# EAGLE board v1 (EAGLE 9.2.2)
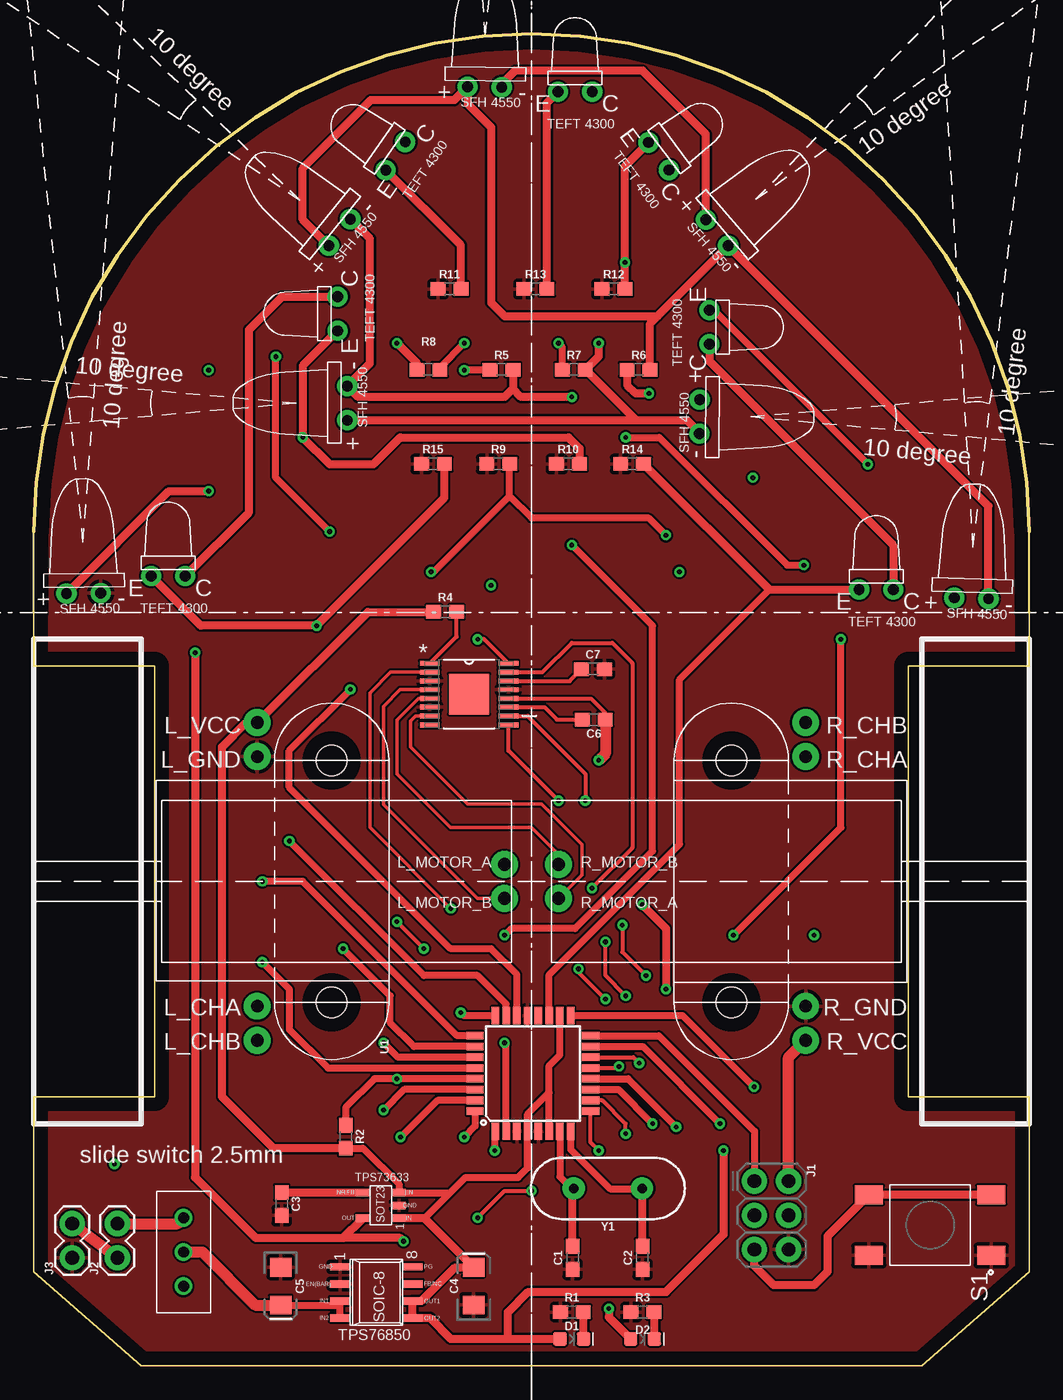
[diagram p0: board, top side]
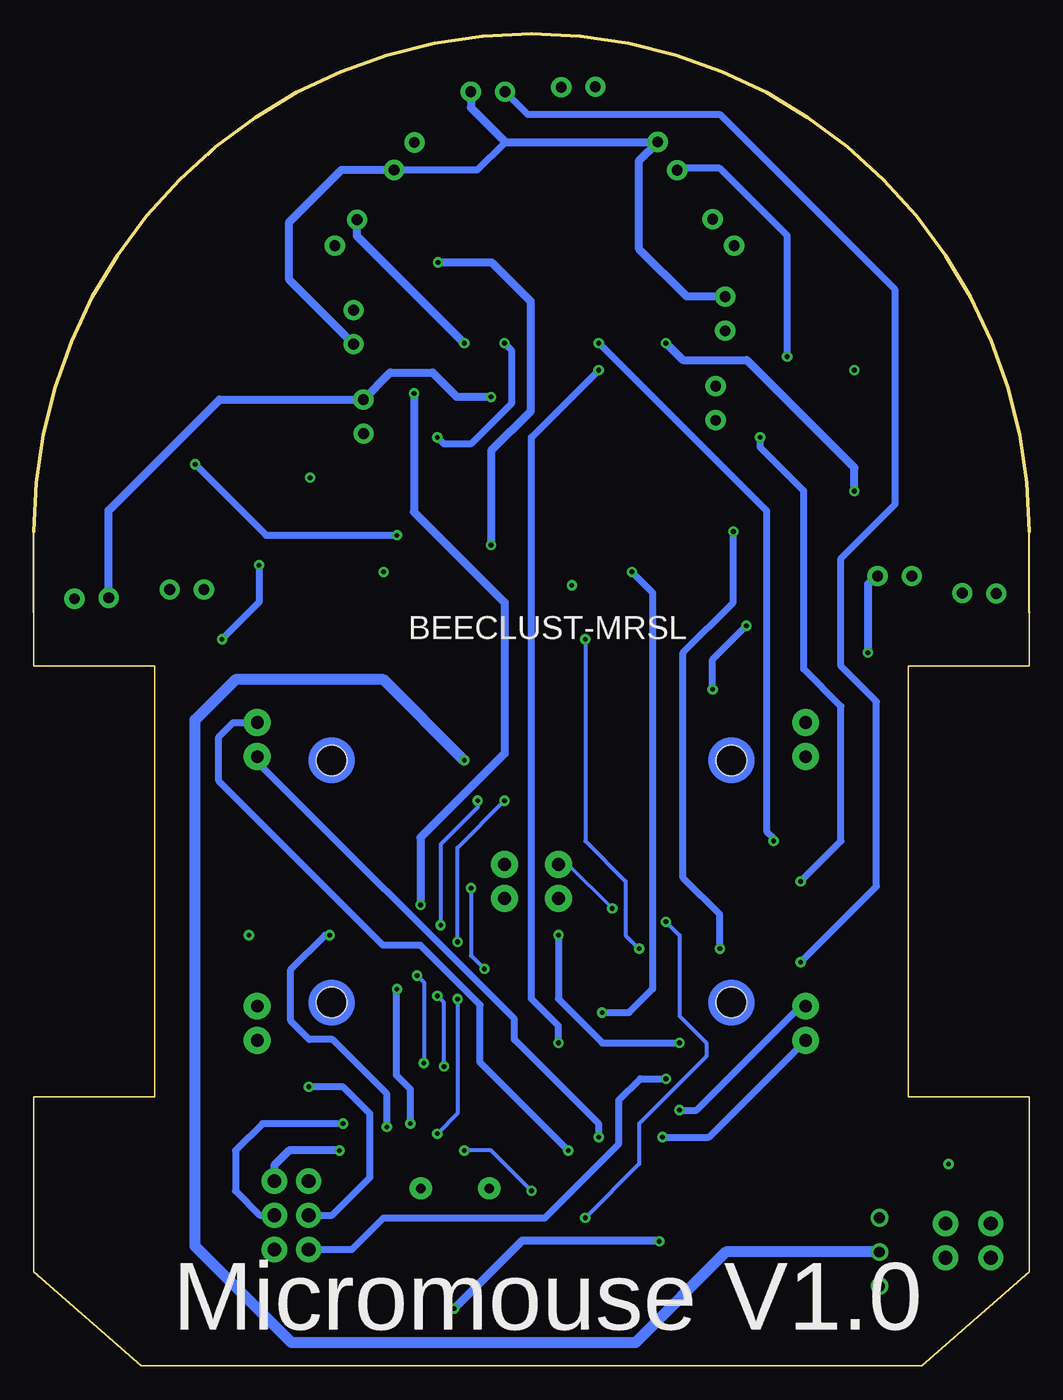
[diagram p1: board, bottom side, seen from below]

Size 74 x 99 mm. Coordinates in mm from the lower left corner, seen from the top.
Outline: 0,16 0,7 8,0 66,0 74,7 74,16
Outline: 0,56 0,62 arc-180 74,62 74,56
Copper layers (1*16): Top 0.035mm / dielectric 1.5mm / Bottom 0.035mm
Design rules "default": minimum track width 6mil, minimum drill 0.35mm, track to track 6mil, track to pad 6mil, pad to pad 6mil, via to via 6mil, smd to smd 6mil, copper to edge 40mil, drill to drill 6mil, minimum pad ring 10mil, minimum via ring 8mil, stop-mask expansion 4mil, vias tented up to drill 0mil, thermal gap 10mil

## Footprints (pad centres in the part's own frame; a part is rotated, then mirrored left to right if it is on the bottom)
0603 = smd 1.1 x 1: 1 -0.85,0; 2 0.85,0
EIA3216 = smd 1.4 x 1.6: + 1.4,0; - -1.4,0
LED-0603 = smd 1 x 1: A -0.877,0; C 0.877,0
SOP65P640X120-17N = smd 1.473 x 0.356: 1 -2.921,2.286; 2 -2.921,1.626; 3 -2.921,0.965; 4 -2.921,0.33; 5 -2.921,-0.33; 6 -2.921,-0.965; 7 -2.921,-1.626; 8 -2.921,-2.286; 9 2.921,-2.286; 10 2.921,-1.626; 11 2.921,-0.965; 12 2.921,-0.33; 13 2.921,0.33; 14 2.921,0.965; 15 2.921,1.626; 16 2.921,2.286 | smd 2.997 x 2.997: 17 0,0
2X3-NS = drill 1.016 pad 1.88: 1 -2.54,-1.27; 2 -2.54,1.27; 3 0,-1.27; 4 0,1.27; 5 2.54,-1.27; 6 2.54,1.27
1X02 = drill 1.016 pad 1.88: 1 0,0; 2 2.54,0
SW_2-1437565-7 = smd 2.1 x 1.4: 1 -4.55,2.25; 2 4.55,2.25; 3 -4.55,-2.25; 4 4.55,-2.25
TQFP32-08 = smd 1.27 x 0.559: 1 -4.293,2.8; 2 -4.293,2; 3 -4.293,1.2; 4 -4.293,0.4; 5 -4.293,-0.4; 6 -4.293,-1.2; 7 -4.293,-2; 8 -4.293,-2.8; 17 4.293,-2.8; 18 4.293,-2; 19 4.293,-1.2; 20 4.293,-0.4; 21 4.293,0.4; 22 4.293,1.2; 23 4.293,2; 24 4.293,2.8 | smd 0.559 x 1.27: 9 -2.8,-4.293; 10 -2,-4.293; 11 -1.2,-4.293; 12 -0.4,-4.293; 13 0.4,-4.293; 14 1.2,-4.293; 15 2,-4.293; 16 2.8,-4.293; 25 2.8,4.293; 26 2,4.293; 27 1.2,4.293; 28 0.4,4.293; 29 -0.4,4.293; 30 -1.2,4.293; 31 -2,4.293; 32 -2.8,4.293
TPS73633(SOT-23) = smd 0.55 x 1: EN 0.95,-1.35; GND 0,-1.35; IN -0.95,-1.35; NR/FB 0.95,1.35; OUT -0.95,1.35
TPS76850(SOIC-8) = smd 0.55 x 1.5: EN(BAR) -0.635,-2.7; FB/NC -0.635,2.7; GND -1.905,-2.7; IN1 0.635,-2.7; IN2 1.905,-2.7; OUT1 0.635,2.7; OUT2 1.905,2.7; PG -1.905,2.7
TS02_SWITCH = drill 0.8: PIN1 0,2.54; PIN2 0,0; PIN3 0,-2.54
FUTURA_V1.0_MOTOT_MOUNT = drill 0.95 pad 2: L_CHA -20.375,26.73; L_CHB -20.375,24.19; L_GND -20.375,45.27; L_MOTOR_A -2,37.27; L_MOTOR_B -2,34.73; L_VCC -20.375,47.81; R_CHA 20.375,45.27; R_CHB 20.375,47.81; R_GND 20.375,26.73; R_MOTOR_A 2,34.73; R_MOTOR_B 2,37.27; R_VCC 20.375,24.19 | hole 2.286: 14.85,45; 14.85,27; -14.85,27; -14.85,45
EMITTER = drill 0.8 pad 1.5: + -1.27,-0.5; - 1.27,-0.5
RECEIVER = drill 0.8 pad 1.5: C 1.27,-0.5; E -1.27,-0.5
HC49US = drill 0.7 pad 1.651: 1 -2.54,0; 2 2.54,0

## Placement (x,y rotation side)
C1  22pF  [0603]  40.06,8.03 90 top
C2  22pF  [0603]  45.25,8.03 90 top
C3  0.1uF  [0603]  18.44,12.03 270 top
C4  10uF  [EIA3216]  32.71,5.92 90 top
C5  10uF  [EIA3216]  18.36,5.92 270 top
C6  10pF  [0603]  41.63,48.03 180 top
C7  2.2uF  [0603]  41.57,51.78 0 top
D1  [LED-0603]  40,2 0 top
D2  [LED-0603]  45.25,2 0 top
DRV8833PWP1  [SOP65P640X120-17N]  32.36,49.92 0 top
J1  AVR_SPI_PROG_3X2NS  [2X3-NS]  54.84,11.19 270 top
J2  [1X02]  6.22,8.03 90 top
J3  [1X02]  2.87,8.03 90 top
R1  330  [0603]  40,4 0 top
R2  10k  [0603]  23.2,17.03 270 top
R3  150  [0603]  45.25,4 0 top
R4  10k  [0603]  30.58,56.03 0 top
R5  470  [0603]  34.77,74.03 0 top
R6  470  [0603]  44.96,74.03 0 top
R7  470  [0603]  40.15,74.03 0 top
R8  1k  [0603]  29.34,74.03 0 top
R9  4.7k  [0603]  34.53,67.03 0 top
R10  4.7k  [0603]  39.72,67.03 0 top
R11  4.7k  [0603]  30.91,80.03 0 top
R12  4.7k  [0603]  43.1,80.03 0 top
R13  4.7k  [0603]  37.29,80.03 0 top
R14  4.7k  [0603]  44.48,67.03 0 top
R15  4.7k  [0603]  29.67,67.03 0 top
S1  2-1437565-7  [SW_2-1437565-7]  66.63,10.46 180 top
U1  ATMEGA328P_TQFP  [TQFP32-08]  37.11,21.73 90 top
U$1  TPS73633(SOT-23)  [TPS73633(SOT-23)]  25.79,11.92 90 top
U$2  TPS76850(SOIC-8)  [TPS76850(SOIC-8)]  25.47,5.46 270 top
U$3  TS02_SWITCH  [TS02_SWITCH]  11.14,8.46 0 top
U$4  FUTURA_V1.0_MOTOR_MOUNT  [FUTURA_V1.0_MOTOT_MOUNT]  37,0 0 top
U$5  EMITTER  [EMITTER]  69.71,57.54 358.3 top
U$6  EMITTER  [EMITTER]  33.53,95.54 359.4 top
U$7  EMITTER  [EMITTER]  22.35,84.54 51 top
U$8  EMITTER  [EMITTER]  51.17,84.54 310.6 top
U$9  EMITTER  [EMITTER]  49.99,70.54 269.8 top
U$10  EMITTER  [EMITTER]  22.81,71.54 90 top
U$11  EMITTER  [EMITTER]  3.71,57.92 0.8 top
U$12  RECEIVER  [RECEIVER]  50.72,77.19 270 top
U$13  RECEIVER  [RECEIVER]  22.1,78.19 90 top
U$14  RECEIVER  [RECEIVER]  26.48,90.19 55.2 top
U$15  RECEIVER  [RECEIVER]  46.86,90.19 306.6 top
U$16  RECEIVER  [RECEIVER]  40.24,95.19 0 top
U$17  RECEIVER  [RECEIVER]  62.62,58.19 0 top
U$18  RECEIVER  [RECEIVER]  10,59.19 0 top
Y1  16MHz  [HC49US]  42.68,13.19 180 top

## Library data of the parts
C1 C2 = SparkFun-Capacitors; PROD_ID: CAP-07876
C3 = SparkFun-Capacitors; PROD_ID: CAP-00810
C4 C5 = SparkFun-Capacitors; PROD_ID: CAP-00811
C6 = SparkFun-Capacitors; PROD_ID: CAP-11812
C7 = SparkFun-Capacitors; PROD_ID: CAP-07888
D1 D2 = SparkFun-LED
DRV8833PWP1 = DRV8833PWP
J1-J3 = SparkFun-Connectors
R1 = SparkFun-Resistors; PROD_ID: RES-00818
R2 R4 = SparkFun-Resistors; PROD_ID: RES-00824
R3 = SparkFun-Resistors; PROD_ID: RES-11028
R5-R7 = SparkFun-Resistors; PROD_ID: RES-07869
R8 = SparkFun-Resistors; PROD_ID: RES-07856
R9-R15 = SparkFun-Resistors; PROD_ID: RES-07857
S1 = 2-1437565-7; MANUFACTURER: TE Connectivity; PARTREV: V; STANDARD: Manufacturer recommendations
U1 = SparkFun-IC-Microcontroller; PROD_ID: IC-09069
U$1 = TPS73633(SOT-23)
U$2 = TPS76850(SOIC-8)
U$3 = 2.54mm slide switch
U$4 = Futura 1.0 motor mount template
U$5-U$18 = sfh4550 & teft4300
Y1 = SparkFun-Clocks; PROD_ID: XTAL-08181; SF_ID: COM-00536

## Nets
3.3V: D2.A U$1.OUT U$12.C U$13.C U$14.C U$15.C U$16.C U$17.C U$18.C
5V: C4.+ D1.A J1.2 R2.2 R4.1 U1.4 U1.6 U1.18 U$1.EN U$1.IN U$2.OUT1 U$2.OUT2 U$4.L_VCC U$4.R_VCC
A1: DRV8833PWP1.16 U1.9
A2: DRV8833PWP1.15 U1.10
B1: DRV8833PWP1.9 U1.13
B2: DRV8833PWP1.10 U1.14
GND: C1.1 C2.1 C3.2 C4.- C5.- C7.2 DRV8833PWP1.3 DRV8833PWP1.6 DRV8833PWP1.13 J1.6 J3.1 R1.1 R3.1 R9.1 R10.1 R11.1 R12.1 R13.1 R14.1 R15.1 S1.1 S1.2 U1.3 U1.5 U1.21 U$1.GND U$2.EN(BAR) U$2.GND U$4.L_GND U$4.R_GND U$11.-
IR_A: R5.1 U1.2
IR_B: R6.1 U1.11
IR_C: R7.1 U1.12
IR_D: R8.2 U1.23
L_CHA: U1.30 U$4.L_CHA
L_CHB: U1.31 U$4.L_CHB
LM_1: DRV8833PWP1.2 U$4.L_MOTOR_A
LM_2: DRV8833PWP1.4 U$4.L_MOTOR_B
MISO: J1.1 U1.16
MOSI: J1.4 U1.15
N$1: D1.C R1.2
N$2: C1.2 U1.7 Y1.2
N$3: C2.2 U1.8 Y1.1
N$4: D2.C R3.2
N$5: J2.1 J3.2
N$6: DRV8833PWP1.1 R4.2
N$7: C3.1 U$1.NR/FB
N$8: R6.2 U$5.- U$6.+ U$7.+ U$8.-
N$9: R8.1 U$11.+
N$10: R5.2 U$5.+ U$7.- U$9.+ U$10.-
N$11: R7.2 U$6.- U$8.+ U$9.- U$10.+
N$16: C7.1 DRV8833PWP1.14
N$19: C6.2 DRV8833PWP1.11
R1: R9.2 U1.24 U$12.E
R2: R10.2 U1.25 U$13.E
R3: R11.2 U1.26 U$14.E
R4: R12.2 U1.27 U$15.E
R5: R13.2 U1.28 U$16.E
R6: R14.2 U1.19 U$17.E
R7: R15.2 U1.22 U$18.E
R_CHA: U1.32 U$4.R_CHA
R_CHB: U1.1 U$4.R_CHB
RESET: J1.5 R2.1 S1.3 S1.4 U1.29
RM_1: DRV8833PWP1.7 U$4.R_MOTOR_A
RM_2: DRV8833PWP1.5 U$4.R_MOTOR_B
SCK: J1.3 U1.17
V_BAT: C5.+ C6.1 DRV8833PWP1.12 U$2.IN1 U$2.IN2 U$3.PIN2
VIN: J2.2 U$3.PIN1

## Tracks (layer width: path | path; a pad name or v marks a point on that pad's centre or on a via)
3.3V  (via drill 0.35)
  Top 0.61: U$18.C 16,63.42 16,77 18.46,79.46 U$13.C | U$12.C 50.22,74.65 63.89,60.98 U$17.C | v12,53 12,14 16.5,9.5 23,9.5 | 23,9.5 24.44,10.94 U$1.OUT | D2.A 42.75,3.62 v42.75,4.25 | v27.5,9.25 27.25,9.5 23,9.5
  Bottom 0.508: U$15.C 41.02,88.87 38.95,90.95
  Bottom 0.61: U$13.C 25.46,79.46 29,83 29,89.56 U$14.C 38.95,90.95 41.51,93.51 U$16.C | U$12.C 55,80.7 55,85 51.13,88.87 U$15.C | U$18.C 11.27,58.81 12,58.08 v12,53 | v42.75,4.25 37.67,9.33 27.58,9.33 v27.5,9.25
5V  (via drill 0.35)
  Top 0.508: U1.6 38.31,20.31 | 38.31,20.31 38.31,22.31 39.11,23.11 U1.18 | 38.31,20.31 36.71,18.71 U1.4 36.71,14.71 36,14 32.09,14 30.96,12.87 | R2.2 24.47,16.18 27.14,13.51 U$1.EN 30.96,12.87 | 29.06,10.97 30.96,12.87
  Top 0.61: U$1.IN 29.06,10.97 C4.+ 31.32,7.32 28.83,4.82 U$2.OUT1 U$2.OUT2 29.44,3.55 31,2 35.25,2 | R4.1 24.84,56.03 U$4.L_VCC 15.81,47.81 14,46 14,20 17.82,16.18 R2.2 | 35.25,2 D1.A | 35.25,2 35.25,4 36.75,5.5 47,5.5 51.27,9.77 v51.27,16
  Top 0.813: J1.2 56.11,22.92 U$4.R_VCC
  Bottom 0.61: v51.27,16 55,16 56.11,14.89 J1.2
A1  (via drill 0.35)
  Top 0.305: DRV8833PWP1.16 33.49,54 v33,54 | v29,31 v27,33 | v33,11 35,13 v37,13 | v42,16 41.4,16.6 U1.9
  Bottom 0.305: v33,54 33,39 30,36 30,32 v29,31 | v27,33 26,32 26,26 24,24 24,23 29,18 29,15 v33,11 | v37,13 40,16 v42,16
A2  (via drill 0.35)
  Top 0.305: U1.10 42.27,19.73 44,18 v44,17.25 | DRV8833PWP1.15 37.82,51.55 40,53.73 43,53.73 44.5,52.23 44.5,38.5 v41.5,35.5 | v40.5,29.5 40.5,29.25 v42.5,27.25
  Bottom 0.305: v40.5,29.5 41.5,30.5 v41.5,35.5 | v42.5,27.25 42.5,18.75 v44,17.25
B1  (via drill 0.35)
  Top 0.305: U1.13 43.38,22.13 v43.5,22.25 | v44,27.5 42.5,29 v42.5,31.5 | v39,42 35.28,45.72 DRV8833PWP1.9
  Bottom 0.305: v43.5,22.25 43.5,27 v44,27.5 | v42.5,31.5 42.5,38.5 v39,42
B2  (via drill 0.35)
  Top 0.305: U1.14 44.57,22.93 v45,22.5 | DRV8833PWP1.10 36.71,48.29 41,44 v41,42 | v43.75,32.75 43.75,30.75 v45.5,29
  Bottom 0.305: v41,42 41,41.5 43.75,38.75 v43.75,32.75 | v45.5,29 45,28.5 v45,22.5
GND
  pour Top: -4,-4 -4,109 83,109 83,-5 -3,-5
IR_A  (via drill 0.35)
  Top 0.508: U1.2 35.11,23.89 v35,24 | v32,74 32.03,74.03 R5.1
  Bottom 0.508: v35,24 35,25.27 37,27.27 37,69 v32,74
IR_B  (via drill 0.35)
  Top 0.508: v46,18 43.47,20.53 U1.11
  Top 0.61: R6.1 44.11,72.89 44.73,72.27 v45.73,72.27 | v45.25,34.25 47,32.5 v47,28
  Bottom 0.508: v47,28 47.04,27.96 47.04,21.59 46,20.55 v46,18
  Bottom 0.61: v45.73,72.27 45.73,63.46 39,56.73 39,45.5 45.25,39.25 v45.25,34.25
IR_C  (via drill 0.35)
  Top 0.508: U1.12 44.17,21.33 v47.75,17.75 | v52,32 60,40 v60,54 | R7.1 39.3,75.7 v39,76 | v44,69 46.5,69 56,59.5 v57.25,59.5
  Bottom 0.508: v52,32 52.35,32 54.9,29.45 54.9,25.64 53.52,24.26 51.8,24.26 47.75,20.21 v47.75,17.75 | v39,76 38.5,75.5 38.5,71.5 41.5,68.5 43.5,68.5 v44,69 | v57.25,59.5 57.25,56.75 v60,54
IR_D  (via drill 0.35)
  Top 0.508: U1.23 35.11,26.89 33,29 29,29 v19,39 | v32,76 30.19,74.19 R8.2
  Bottom 0.508: v19,39 19,39.19 19.54,39.73 19.54,63.54 v32,76
L_CHA  (via drill 0.35)
  Top 0.508: U1.30 27.53,20.53 v26,19
  Bottom 0.508: v26,19 24.73,19 17,26.73 U$4.L_CHA
L_CHB  (via drill 0.35)
  Top 0.508: U1.31 30,19.73 v27.27,17
  Bottom 0.508: v27.27,17 23.81,17 U$4.L_CHB
LM_1  (via drill 0.35)
  Top 0.254: DRV8833PWP1.2 26.55,51.55 25,50 25,40 v31,34
  Bottom 0.254: v31,34 34.27,37.27 U$4.L_MOTOR_A
LM_2
  Top 0.254: U$4.L_MOTOR_B 33,34.73 26,41.73 26,49 27.25,50.25 DRV8833PWP1.4
MISO
  Top 0.508: U1.16 46.47,24.53 53.57,17.43 J1.1
MOSI  (via drill 0.35)
  Top 0.508: U1.15 45.27,23.73 v51,18
  Bottom 0.508: J1.4 57.19,11.19 59,13 59,16 57,18 v51,18
N$1
  Top 0.61: D1.C 40.88,3.97 R1.2
N$2
  Top 0.508: U1.7 39.11,14.06 40.06,13.11
  Top 0.61: C1.2 40.06,13.11 Y1.2
N$3
  Top 0.508: U1.8 39.91,16.09 42.84,13.16 45.25,13.16
  Top 0.61: C2.2 45.25,13.16 Y1.1
N$4
  Top 0.61: D2.C 46.13,3.97 R3.2
N$5
  Top 0.813: J2.1 J3.2
N$6
  Top 0.305: DRV8833PWP1.1 31.43,54.2 R4.2
N$7
  Top 0.61: C3.1 U$1.NR/FB
N$8
  Top 0.61: R6.2 45.81,77.44 46.37,78 | 46.37,78 U$8.- 70.97,63.9 U$5.- | U$7.+ 20,85.18 20,89 25.05,94.05 31.25,94.05 U$6.+ 32.25,93.78 34,92.04 34,79 35,78 46.37,78
N$9  (via drill 0.35)
  Top 0.61: U$11.+ 10.05,65 v13,65 | v27,76 28.49,74.51 R8.1
  Bottom 0.61: v13,65 13,66.75 21,74.75 25.75,74.75 v27,76
N$10  (via drill 0.35)
  Top 0.61: R5.2 35.62,72.62 | 35.62,72.62 35,72 24.12,72 U$10.- 25,74.5 25,83.75 U$7.- | v40,72 36.24,72 35.62,72.62
  Bottom 0.61: U$5.+ 68.43,63.57 60.19,71.81 U$9.+ 47.49,73.81 44.35,73.81 42.54,72 v40,72
N$11  (via drill 0.35)
  Top 0.61: 44.76,70.27 R7.2 42,75.03 v42,76 | U$9.- 49.49,69.35 48.57,70.27 44.76,70.27 | U$8.+ 49.96,91.54 45.25,96.25 35.77,96.25 34.8,95.28 U$6.- | U$10.+ 44.76,70.27
  Bottom 0.61: v42,76 49.96,83.96 U$8.+
N$16
  Top 0.305: DRV8833PWP1.14 39.83,50.89 C7.1
N$19
  Top 0.305: DRV8833PWP1.11 37.95,48.95 38.88,48.03 C6.2
R1  (via drill 0.35)
  Top 0.508: U1.24 31.98,26.02 v31.75,26.25 | v29.54,59 29.73,59 35.38,64.65 | 35.38,64.65 R9.2 | U$12.E 50.54,78.46 v62,67 | v47,61.73 45.73,63 37.03,63 35.38,64.65
  Bottom 0.508: v29.54,59 28,57.46 28,28 29.75,26.25 v31.75,26.25 | v62,67 56.73,61.73 v47,61.73
R2  (via drill 0.35)
  Top 0.508: U1.25 31.47,24.53 20,36 v17,36
  Top 0.61: U$13.E 20,74.32 v20,69 22,67 25.25,67 27.25,69 39.75,69 40.57,68.18 R10.2
  Bottom 0.508: v17,36 14,39 14,49 16.77,51.77 16.77,65.02 20,68.25 v20,69
R3  (via drill 0.35)
  Top 0.508: U1.26 28.27,23.73 26.5,25.5 26.5,27.5 v23,31 | v22,62 18,66 v18,75
  Top 0.61: R11.2 31.76,83.27 U$14.E
  Bottom 0.508: v23,31 23,33.54 25.73,36.27 25.73,53 22,56.73 v22,62 | v18,75 18,84 23,89 26.03,89 U$14.E
R4  (via drill 0.35)
  Top 0.508: U1.27 27.07,22.93 v26,24 | v35,32 35.5,32.5 40.25,32.5 46,38.25 46,55 v40,61
  Top 0.61: R12.2 v43.95,82 43.95,89.16 U$15.E
  Bottom 0.508: v35,32 35,27.27 31.73,24 v26,24
  Bottom 0.61: v40,61 40,68 37.05,70.95 37.05,79.1 39.95,82 v43.95,82
R5  (via drill 0.35)
  Top 0.508: v17,30 19,28 19,25 21.87,22.13 U1.28
  Top 0.61: R13.2 38.14,93.86 U$16.E
  Bottom 0.508: U$16.E 37.28,93 23,93 10,80 10,64 14,60 14,52 11.37,49.36 11.37,35.63 v17,30
R6
  Top 0.508: U1.19 38.31,29.06 48,38.75 48,51 54.69,57.69 55,57.69
  Top 0.61: R14.2 54.67,57.69 55,57.69 U$17.E
R7  (via drill 0.35)
  Top 0.508: U1.22 35.91,29.09 34,31 31,31 19,43 19,45.73 v23.54,50.27
  Top 0.61: R15.2 30.52,64.49 v21.03,55 12.42,55 U$18.E
  Bottom 0.508: v23.54,50.27 23.54,52.49 v21.03,55
R_CHA  (via drill 0.35)
  Top 0.508: U1.32 32.82,17.82 v32,17
  Bottom 0.508: v32,17 32,17.98 38.28,24.26 38.28,25.78 57.38,44.88 U$4.R_CHA
R_CHB  (via drill 0.35)
  Top 0.508: U1.1 34.27,17.4 v34.27,16
  Bottom 0.508: U$4.R_CHB 59.19,47.81 60.25,46.75 60.25,43.48 48.03,31.26 45.25,31.26 40.81,26.81 40.81,22.54 v34.27,16
RESET  (via drill 0.35)
  Top 0.508: U1.29 v27,21.33 25.33,21.33 23.2,19.2 R2.1
  Top 0.61: S1.3 S1.4 59.13,9.76 59,9.63 59,7 58,6 55,6 53.57,7.43 J1.5
  Bottom 0.508: J1.5 50.35,8.65 48,11 36,11 30.5,16.5 30.5,19.75 28.92,21.33 v27,21.33
RM_1
  Top 0.254: U$4.R_MOTOR_A 40.75,36.48 40.75,38.75 37.75,41.75 32.25,41.75 28,46 28,47.91 28.38,48.29 DRV8833PWP1.7
RM_2
  Top 0.254: DRV8833PWP1.5 28.59,49.59 27,48 27,44 31,40 37,40 39,38 U$4.R_MOTOR_B
S$1  (via drill 0.35)
  other vias: 6,15
S$2  (via drill 0.35)
  other vias: 58,32
S$3  (via drill 0.35)
  other vias: 34,58
S$4  (via drill 0.35)
  other vias: 13,74
S$5  (via drill 0.35)
  other vias: 53.46,66
S$6  (via drill 0.35)
  other vias: 48,59
SCK  (via drill 0.35)
  Top 0.508: v53.54,20.73 48.25,26.02 U1.17
  Bottom 0.508: J1.3 51.81,11.19 49,14 49,18.73 51,20.73 v53.54,20.73
V_BAT  (via drill 0.35)
  Top 0.305: DRV8833PWP1.12 41.41,49.59 42.48,48.52 C6.1
  Top 0.508: C5.+ 22.47,4.52 U$2.IN1 U$2.IN2
  Top 0.813: U$3.PIN2 12.54,8.46 16.48,4.52 C5.+ | C6.1 42.48,45.48 v42,45
  Bottom 0.813: U$3.PIN2 22.54,8.46 29.27,1.73 54.84,1.73 62,8.89 62,48 59,51 48,51 v42,45
VIN
  Top 0.813: J2.2 10.71,10.57 U$3.PIN1

## Text on the board
bNames: BEECLUST-MRSL | Micromouse V1.0